# Altium PCB NBP3 Altera MAX7000 MAX3000 PLCC Rev1.00.PcbDoc (part 2 of 2)
Units mm, origin at the board's own origin, x right, y up, seen from the top; angles counter-clockwise.
Board outline 69 x 80.99 mm, 2 copper layers (Top Layer, Bottom Layer); 33 components, 75 nets, 412 pads, 171 vias.
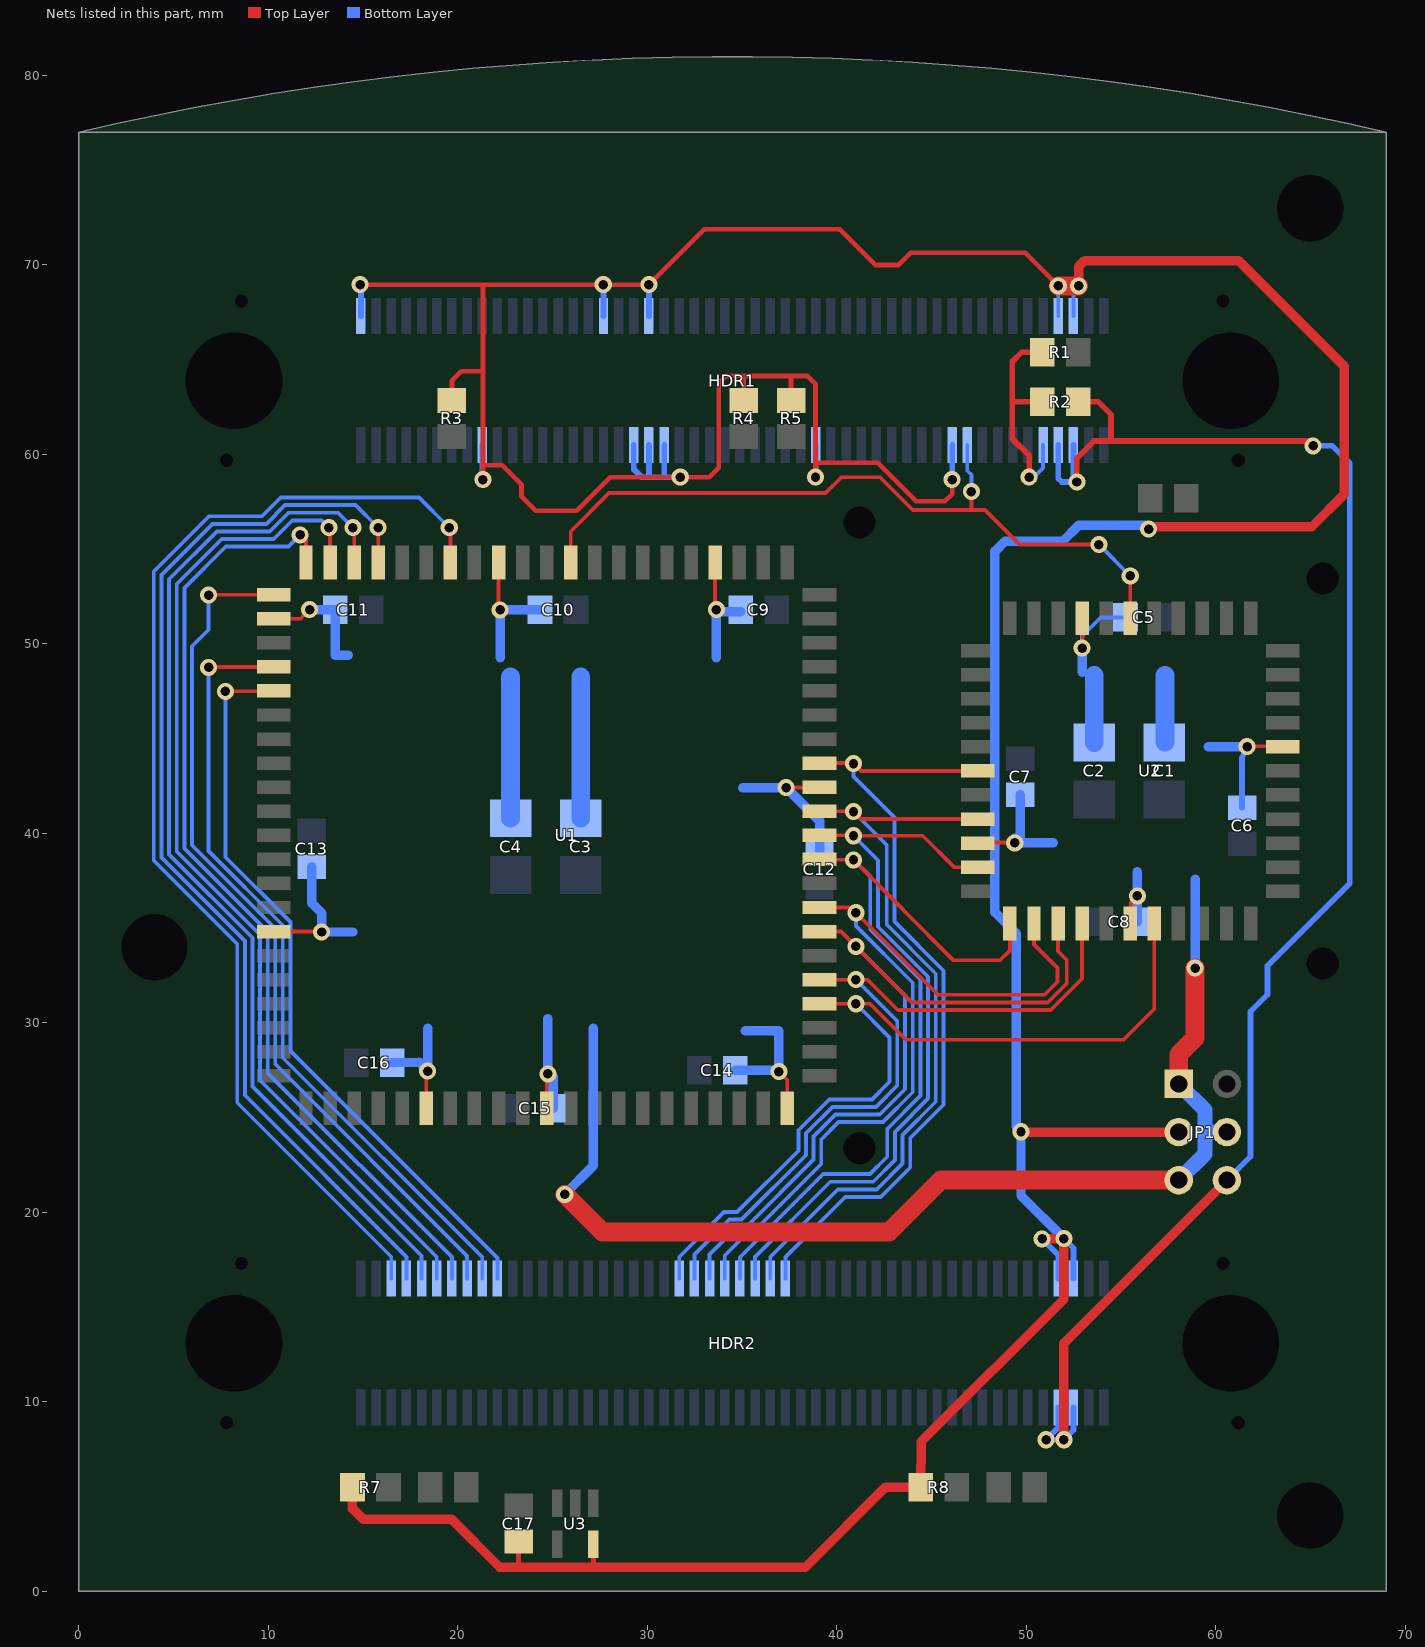
[diagram p2: the nets of this part, all layers, seen from the top]

## Via types
v1: diameter 0.9, hole 0.5, Top Layer to Bottom Layer, 165 vias
v2: diameter 1.27, hole 0.7, Top Layer to Bottom Layer, 6 vias

## Nets (pads, with @x,y where several pads share a name; then routed paths per layer and width w, separated by ;. In a path a pad name is that pad's centre, name@x,y a point inside that pad or via, vN(x,y) a via of type N, cw(c..) or ccw(c..) an arc to the next point about the centre after c; other vN are vias at no path point) (continued)
SW0: HDR2.44 U1.57 U2.24 | length 45.2
  Top Layer w0.2: U1.57@39.1,31.01 41.761,31.01 43.656,29.115 55.15,29.115 56.77,30.735 U2.24@56.77,35.25
  Bottom Layer w0.2: HDR2.44@31.7,16.5 31.7,17.653 34.064,20.017 34.749,20.017 37.986,23.254 37.986,24.338 39.613,25.965 41.865,25.965 42.799,26.899 42.799,29.232 v1(41.021,31.01)
SW1: HDR2.46 U1.58 U2.21 | length 41
  Top Layer w0.2: U1.58@39.1,32.28 41.634,32.28 43.231,30.683 51.308,30.683 52.96,32.335 U2.21@52.96,35.25
  Bottom Layer w0.2: HDR2.46@32.5,16.5 32.5,17.78 34.337,19.617 34.984,19.617 38.386,23.019 38.386,24.172 39.779,25.565 42.075,25.565 43.205,26.695 43.205,30.096 v1(41.021,32.28)
SW2: HDR2.48 U1.60 U2.20 | length 42.9
  Top Layer w0.2: U1.60@39.1,34.82 40.237,34.82 43.974,31.083 51.142,31.083 52.146,32.087 52.146,33.326 51.69,33.782 U2.20@51.69,35.25
  Bottom Layer w0.2: HDR2.48@33.3,16.5 33.3,17.78 34.737,19.217 35.219,19.217 38.786,22.784 38.786,24.007 39.944,25.165 42.278,25.165 43.612,26.499 43.612,31.445 v1(41.021,34.036)
SW3: HDR2.50 U1.61 U2.19 | length 44.5
  Top Layer w0.2: U1.61@39.1,36.09 40.745,36.09 45.352,31.483 50.977,31.483 51.664,32.17 51.664,32.893 50.42,34.137 U2.19@50.42,35.25
  Bottom Layer w0.2: HDR2.50@34.1,16.5 34.1,17.717 35.2,18.817 35.454,18.817 39.192,22.555 39.192,23.847 40.11,24.765 42.443,24.765 44.018,26.34 44.018,32.119 41.021,35.117 v1(41.021,35.814)
SW4: HDR2.52 U1.63 U2.18 | length 42.9
  Top Layer w0.2: U1.63@39.1,38.63 v1(40.894,38.608) 46.139,33.312 48.641,33.312 49.15,33.821 U2.18@49.15,35.25
  Bottom Layer w0.2: HDR2.52@34.9,16.5 34.9,17.628 39.294,22.022 41.758,22.022 42.672,22.936 42.672,24.409 44.425,26.162 44.425,32.279 41.783,34.92 41.783,37.719 v1(40.894,38.608)
SW5: HDR2.54 U1.64 U2.16 | length 39.2
  Top Layer w0.2: U1.64@39.1,39.9 40.872,39.9 v1(40.894,39.878) 44.545,39.878 46.203,38.22 U2.16@47.45,38.22
  Bottom Layer w0.2: HDR2.54@35.7,16.5 35.7,17.653 39.662,21.615 41.935,21.615 43.078,22.758 43.078,24.25 44.831,26.003 44.831,32.438 42.189,35.08 42.189,38.583 v1(40.894,39.878)
SW6: HDR2.56 U1.65 U2.14 | length 39.8
  Top Layer w0.2: U1.65@39.1,41.17 40.872,41.17 41.282,40.76 U2.14@47.45,40.76
  Bottom Layer w0.2: HDR2.56@36.5,16.5 36.5,17.653 40.062,21.215 42.12,21.215 43.485,22.581 43.485,24.091 45.237,25.843 45.237,32.597 42.647,35.188 42.647,39.395 v1(40.894,41.148)
SW7: HDR2.58 U1.67 U2.12 | length 42.2
  Top Layer w0.2: U1.67@39.1,43.71 40.872,43.71 41.282,43.3 U2.12@47.45,43.3
  Bottom Layer w0.2: HDR2.58@37.3,16.5 37.3,17.653 40.462,20.815 42.329,20.815 43.891,22.377 43.891,23.932 45.644,25.684 45.644,32.757 43.053,35.347 43.053,40.841 40.894,43 v1(40.894,43.688)
SWC0: HDR2.18 U1.15 | length 41.7
  Top Layer w0.2: v1(6.858,48.768) 6.88,48.79 U1.15@10.3,48.79
  Bottom Layer w0.2: v1(6.858,48.768) 6.858,39.069 10.775,35.153 10.775,28.163 21.3,17.638 HDR2.18@21.3,16.5
SWC1: HDR2.16 U1.12 | length 45.9
  Top Layer w0.2: v1(6.858,52.578) v1@6.88,52.578 ; v1@6.88,52.6 U1.12@10.3,52.6
  Bottom Layer w0.2: v1(6.858,52.578) 6.858,50.749 5.988,49.879 5.988,39.374 10.375,34.987 10.375,27.827 20.5,17.702 HDR2.16@20.5,16.5
SWC2: HDR2.14 U1.11 | length 51.3
  Top Layer w0.2: v1(11.684,55.753) 12,55.437 U1.11@12,54.3 ; U1.11@12.065,54.102 U1.11@12.065,54.3
  Bottom Layer w0.2: v1(11.684,55.753) 11.068,55.137 7.766,55.137 5.588,52.959 5.588,39.208 9.975,34.821 9.975,27.363 19.7,17.638 HDR2.14@19.7,16.5
SWC3: HDR2.6 U1.5 | length 62.3
  Top Layer w0.2: v1(19.558,56.134) 19.62,56.072 U1.5@19.62,54.3
  Bottom Layer w0.2: HDR2.6@16.5,16.5 16.5,17.663 8.375,25.788 8.375,34.159 3.962,38.571 3.962,53.823 6.877,56.737 9.671,56.737 10.668,57.734 17.958,57.734 v1(19.558,56.134)
SWR0: HDR2.20 U1.16 | length 39.5
  Top Layer w0.2: v1@7.769,47.52 v1(7.747,47.498) U1.16@10.3,47.52
  Bottom Layer w0.2: v1(7.747,47.498) 7.747,38.746 11.175,35.318 11.175,28.525 22.1,17.6 HDR2.20@22.1,16.5
SWR1: HDR2.12 U1.10 | length 53.8
  Top Layer w0.2: v1(13.208,56.134) 13.27,56.072 U1.10@13.27,54.3
  Bottom Layer w0.2: v1(13.208,56.134) 12.827,56.515 11.278,56.515 10.3,55.537 7.556,55.537 5.182,53.162 5.182,39.049 9.575,34.656 9.575,26.978 18.9,17.653 HDR2.12@18.9,16.5
SWR2: HDR2.10 U1.9 | length 55.8
  Top Layer w0.2: U1.9@14.54,54.3 14.54,56.072 v1(14.478,56.134) v1@14.54,56.174
  Bottom Layer w0.2: v1(14.478,56.134) 13.691,56.921 11.074,56.921 10.09,55.937 7.296,55.937 4.775,53.416 4.775,38.89 9.175,34.49 9.175,26.639 18.1,17.714 HDR2.10@18.1,16.5
SWR3: HDR2.8 U1.8 | length 57.8
  Top Layer w0.2: U1.8@15.81,54.3 v1(15.81,56.134)
  Bottom Layer w0.2: v1(15.81,56.134) 14.616,57.328 10.897,57.328 9.906,56.337 7.061,56.337 4.369,53.645 4.369,38.73 8.775,34.324 8.775,26.178 17.3,17.653 HDR2.8@17.3,16.5
TEST: HDR1.81 U1.84 U2.1 | length 40.3
  Top Layer w0.2: U1.84@25.97,54.3 25.97,55.942 27.991,57.963 39.421,57.963 40.259,58.801 42.291,58.801 44.018,57.074 47.828,57.074 49.657,55.245 v1(53.848,55.245) ; 47.117,57.074 v1(47.117,58.039) ; v1(55.499,53.594) v1(55.499,53.594) U2.1@55.5,51.35
  Bottom Layer w0.2: HDR1.81@46.9,60.5 46.9,59.145 47.117,58.928 v1(47.117,58.039) ; v1(53.848,55.245) v1(55.499,53.594)
VCC: C17.1 HDR1.2 HDR1.17 HDR1.34 HDR1.37 HDR1.39 HDR1.40 HDR1.41 HDR1.61 HDR1.79 HDR1.94 HDR1.96 HDR2.94 HDR2.96 JP1.3 R3.1 R4.1 R5.1 R7.1 R8.1 U3.5 | length 264.8
  Top Layer w0.25: v1(14.859,68.961) v1(30.099,68.961) 33.02,71.882 40.157,71.882 42.037,70.002 43.272,70.002 43.919,70.65 49.95,70.65 v1(51.7,68.9) ; R3.1@19.7,62.85 19.7,63.896 20.193,64.389 21.336,64.389 ; v1(21.336,58.674) 21.336,68.961 ; 21.336,59.436 22.352,59.436 23.368,58.42 23.368,57.785 24.13,57.023 26.289,57.023 28.067,58.801 33.274,58.801 33.782,59.309 33.782,63.754 34.163,64.135 38.481,64.135 38.887,63.729 v1(38.887,58.801) ; 23.217,1.27 C17.1@23.217,2.621 ; 27.167,1.27 U3.5@27.167,2.496 ; R4.1@35.1,62.85 35.1,64.135 ; R5.1@37.6,62.85 37.6,64.135 ; 38.887,59.563 42.164,59.563 44.196,57.531 45.72,57.531 46.101,57.912 v1(46.101,58.674)
  Top Layer w0.5: R7.1@14.45,5.5 14.45,4.369 15.009,3.81 19.685,3.81 22.225,1.27 38.354,1.27 42.584,5.5 R8.1@44.45,5.5 44.463,7.892 51.994,15.418 v1(51.994,18.618) ; 50.207,24.24 JP1.3@58.06,24.24 ; v1(50.851,18.6) v1@51.975,18.6 ; v1(52.775,68.9) 52.775,69.92 53.086,70.231 61.214,70.231 66.802,64.643 66.802,57.912 65.075,56.185 56.871,56.185 v1(56.464,56.058)
  Top Layer w1: v1(51.7,68.9) v1(52.775,68.9)
  Bottom Layer w0.2: HDR1.94@51.7,67.3 v1(51.7,68.9) ; HDR1.96@52.5,67.3 52.5,68.625 v1(52.775,68.9)
  Bottom Layer w0.3: HDR1.2@14.9,67.3 v1@14.9,68.92 ; v1@21.3,58.71 HDR1.17@21.3,60.5 ; HDR1.34@27.7,67.3 v1@27.7,68.947 ; HDR1.37@29.3,60.5 29.3,59.219 29.718,58.801 v1(31.75,58.801) ; 30.1,58.801 HDR1.39@30.1,60.5 ; HDR1.40@30.1,67.3 v1(30.099,68.961) ; 30.9,58.801 HDR1.41@30.9,60.5 ; v1@38.9,58.814 HDR1.61@38.9,60.5 ; v1(46.101,58.674) HDR1.79@46.1,60.5 ; v1(50.851,18.6) 51.7,17.751 HDR2.94@51.7,16.5 ; v1(51.994,18.618) 52.5,18.112 HDR2.96@52.5,16.5
  Bottom Layer w0.5: v1(51.994,18.618) 49.733,20.879 v1(49.733,24.257) 49.479,24.511 49.479,34.722 48.359,35.842 48.359,54.887 48.891,55.419 51.939,55.419 52.79,56.27 56.252,56.27 v1@56.591,55.931
  other v1: 27.686,68.961
VCC_FPGA: C1.1 C2.1 C3.1 C4.1 C5.1 C6.1 C7.1 C8.1 C9.2 C10.2 C11.2 C12.1 C13.2 C14.1 C15.1 C16.1 JP1.1 JP1.4 JP1.5 U1.3 U1.13 U1.26 U1.38 U1.43 U1.53 U1.66 U1.78 U2.3 U2.15 U2.23 U2.35 | length 166.8
  Top Layer w0.2: U1.26@10.3,34.82 v1@12.805,34.82 ; U1.13@10.3,51.33 11.706,51.33 v1(12.192,51.816) ; U1.38@18.35,25.5 18.35,27.113 v1(18.415,27.457) ; U1.3@22.16,54.3 22.16,51.881 v1(22.241,51.8) ; 24.7,26.732 U1.43@24.7,25.5 24.7,27.24 v1(24.765,27.305) ; U1.78@33.59,54.3 33.59,51.881 v1(33.655,51.816) ; v1(36.957,27.432) 37.4,26.989 U1.53@37.4,25.5 ; v1(37.338,42.418) 39.078,42.418 U1.66@39.1,42.44 ; U2.15@47.478,39.524 v1@49.122,39.524 ; v1@52.988,49.813 U2.3@52.988,51.384 ; U2.23@55.528,35.284 55.528,36.351 v1(55.88,36.703) ; v1(61.671,44.577) 62.003,44.604 U2.35@63.578,44.604
  Top Layer w1: v1(25.654,20.955) 27.635,18.974 42.774,18.974 45.5,21.7 JP1.5@58.06,21.7 ; JP1.1@58.06,26.78 58.06,28.342 58.928,29.21 v1(58.928,32.893)
  Bottom Layer w0.2: v1(52.959,49.784) 52.959,50.419 53.94,51.4 C5.1@55.25,51.4
  Bottom Layer w0.3: C6.1@61.4,41.35 61.4,44.001 v1(61.671,44.577)
  Bottom Layer w0.5: v1@12.208,51.8 C11.2@13.55,51.8 13.55,49.403 14.224,49.403 ; C13.2@12.3,38.25 12.3,36.322 12.827,35.795 v1(12.827,34.798) 14.478,34.798 ; C16.1@16.55,27.9 17.983,27.915 v1@18.372,27.5 ; v1(18.415,27.457) 18.415,29.718 ; 22.241,49.276 v1(22.241,51.8) C10.2@24.35,51.8 ; v1(24.765,27.305) 24.765,30.226 ; C15.1@25.05,25.5 v1@25.05,27.15 ; v1(25.654,20.955) 27.153,22.454 27.153,29.718 ; 33.655,49.276 v1(33.655,51.816) 33.771,51.7 C9.2@34.95,51.7 ; C14.1@34.65,27.5 36.889,27.5 v1(36.957,27.432) 36.957,29.591 35.179,29.591 ; 35.052,42.418 v1(37.338,42.418) 39.1,40.656 C12.1@39.1,39.05 ; v1@49.4,39.748 v1(49.403,39.497) ; C7.1@49.7,42.05 49.7,39.794 v1(49.403,39.497) ; 51.435,39.497 v1(49.403,39.497) ; 52.959,48.514 v1(52.959,49.784) ; C8.1@55.878,35.334 v1@55.878,36.701 ; v1(55.88,36.703) 55.88,37.973 ; v1(58.928,32.893) 58.928,37.592 ; 59.614,44.577 v1(61.671,44.577)
  Bottom Layer w0.8: JP1.5@58.06,21.7 59.436,23.076 59.436,25.404 JP1.1@58.06,26.78 ; 59.453,24.24 JP1.4@60.6,24.24
  Bottom Layer w1: C4.1@22.8,40.8 22.8,48.26 ; C3.1@26.5,40.8 26.5,48.26 ; C2.1@53.6,44.8 53.6,48.325 ; C1.1@57.328,44.834 57.328,48.336
VCCINT: HDR1.93 HDR1.95 HDR2.93 HDR2.95 JP1.6 R2.1 | length 90.3
  Top Layer w0.3: v1(52.68,58.547) 52.68,59.792 53.594,60.706 64.897,60.706 v1(65.151,60.452) ; R2.1@52.75,62.787 53.799,62.787 54.483,62.103 54.483,60.706
  Top Layer w0.5: v1(51.994,8.001) 51.994,13.094 JP1.6@60.6,21.7
  Bottom Layer w0.3: HDR1.93@51.7,60.5 51.7,58.739 51.892,58.547 v1(52.68,58.547) 52.5,58.727 HDR1.95@52.5,60.5 ; HDR2.95@52.5,9.7 52.5,8.507 v1(51.994,8.001) ; JP1.6@60.6,21.7 61.849,22.949 61.849,30.607 62.738,31.496 62.738,33.02 67.081,37.363 67.081,59.538 66.167,60.452 v1(65.151,60.452) ; v1(51.054,8.001) 51.7,8.647 ; v1(51.054,8.001) v1(51.994,8.001) ; v1(51.054,8.001) 51.7,8.647 ; v1(51.054,8.001) v1(51.994,8.001) ; 51.7,8.647 HDR2.93@51.7,9.7 51.7,8.647
VREF: HDR1.91 R1.1 R2.2 | length 12
  Top Layer w0.3: 49.276,62.787 R2.2@50.85,62.787 ; v1(50.165,58.801) 50.165,59.944 49.276,60.833 49.276,64.897 49.779,65.4 R1.1@50.85,65.4
  Bottom Layer w0.2: v1(50.165,58.801) 50.419,58.801 50.9,59.282 HDR1.91@50.9,60.5
pads on no net: HDR1.3 HDR1.4 HDR1.5 HDR1.6 HDR1.8 HDR1.9 HDR1.10 HDR1.11 HDR1.12 HDR1.13 HDR1.14 HDR1.16 HDR1.18 HDR1.20 HDR1.22 HDR1.24 HDR1.26 HDR1.28 HDR1.30 HDR1.32 HDR1.43 HDR1.44 HDR1.45 HDR1.46 HDR1.47 HDR1.48 HDR1.49 HDR1.50 HDR1.51 HDR1.52 HDR1.53 HDR1.55 HDR1.56 HDR1.57 HDR1.58 HDR1.60 HDR1.62 HDR1.64 HDR1.66 HDR1.68 HDR1.76 HDR1.80 HDR1.82 HDR1.83 HDR1.84 HDR1.85 HDR1.86 HDR1.87 HDR1.88 HDR1.89 HDR1.90 HDR1.92 HDR1.MH1 HDR1.MH2 HDR1.MH3 HDR1.MH4 HDR1.MH5 HDR1.MH6 HDR2.3 HDR2.5 HDR2.43 HDR2.45 HDR2.47 HDR2.49 HDR2.51 HDR2.53 HDR2.55 HDR2.57 HDR2.59 HDR2.61 HDR2.63 HDR2.65 HDR2.67 HDR2.69 HDR2.71 HDR2.73 HDR2.75 HDR2.76 HDR2.77 HDR2.78 HDR2.79 HDR2.80 HDR2.81 HDR2.82 HDR2.83 HDR2.84 HDR2.85 HDR2.86 HDR2.87 HDR2.88 HDR2.89 HDR2.90 HDR2.91 HDR2.92 HDR2.MH1 HDR2.MH2 HDR2.MH3 HDR2.MH4 HDR2.MH5 HDR2.MH6 U1.6 U1.39 U1.46 U1.79 U1.M1 U1.M2 U2.M1 U2.M2 U3.1

## Polygon pours and split planes (outlines as drawn)
GND on Top Layer "Top Layer-GND" (solid, remove dead copper, pour order 1000): 0.127,80.518 68.834,80.645 68.834,0.127 0.127,0.127
GND on Bottom Layer "Bottom Layer-GND" (solid, remove dead copper, pour order 1001): 0.127,80.518 68.834,80.645 68.834,0.127 0.127,0.127

## Keep-outs
Keep-Out Layer:
  the board outline again, w0.8

## Other copper
Bottom Layer:
  rectangle net VCC_FPGA: 33.655,29.21 35.56,48.133
  rectangle net VCC_FPGA: 13.97,29.21 15.875,48.133
  rectangle net VCC_FPGA: 13.97,47.752 35.56,49.657
  rectangle net VCC_FPGA: 15.494,29.21 34.036,31.115
  region net VCC_FPGA: 51.816,48.133 50.673,48.133 50.673,38.608 51.816,38.608
  rectangle net VCC_FPGA: 59.182,38.608 60.325,48.133
  rectangle net VCC_FPGA: 50.673,37.465 60.325,38.735
  rectangle net VCC_FPGA: 50.673,47.752 60.325,49.022

## Silkscreen, mask and mechanical layers (free items; w line width, h text height)
Top Overlay:
  circle w0.127: c4,34 r2.5
  circle w0.127: c65,4 r2.5
  circle w0.127: c65,73 r2.5
  lines w0.127: 0,1.5 1.5,1.5 1.5,0 ; 0,22.3 1.5,22.3 1.5,23.4 0,23.4 ; 0.001,53.6 1.501,53.6 1.501,54.7 0.001,54.7 ; 0,75.5 1.5,75.5 1.5,77.3 ; 15.7,79.8 15.7,78.1 17,78.1 17,79.9 ; 49.7,80.2 49.7,78.7 51,78.7 51,80.1 ; 67.5,0 67.5,1.5 69,1.5 ; 67.5,77.3 67.5,75.5 69,75.5 ; 68.999,22.3 67.5,22.3 67.5,23.4 69,23.4 ; 69,53.6 67.501,53.6 67.501,54.7 69.001,54.7
  lines w0.2: 43.963,21.7 54.885,21.7 56.155,22.97 56.409,22.97 ; 43.963,26.78 54.885,26.78 56.155,25.51 56.409,25.51 ; 56.409,20.43 56.155,20.43 54.885,19.16 43.963,19.16 43.963,29.32 54.885,29.32 56.155,28.05 56.409,28.05 ; 62.251,20.43 66.188,20.43 66.188,28.05 62.251,28.05 ; 62.251,22.97 66.188,22.97 ; 62.251,25.51 66.188,25.51
  text "MAX7000S" at 44.852,27.415 h1.2
  text "5V" at 63.14,26.145 h1.2
  text "MAX3000A" at 44.852,24.875 h1.2
  text "3V3" at 62.632,23.605 h1.2
  text "MAX7000AE" at 44.852,22.335 h1.2
  text "2V5" at 62.632,21.065 h1.2
  text "MAX7000B" at 44.852,19.795 h1.2
Bottom Overlay:
  drawing of 853 lines, arcs and shapes, not listed
  text "REV 1.00" at 47.6,76.5 h1.3
  text "NBP3" at 54.5,76.5 h1.3
  text "1" at 13.97,58.42 h1
  text "1" at 14.224,7.62 h1
PCB Boundary:
  the board outline again, w0.25
  text "PCB boundary coincides with centre-line of tracks and arc" at 0,-12 h0.75
Gerber ID:
  text ".Layer_Name" at 0,-6 h0.75
Printout ID:
  text ".Printout_Name" at 0,-10 h0.75
Design Information:
  drawing of 713 lines, arcs and shapes, not listed
  text "BOCD_1_00_Daughter_NBP3" at 317.627,202.041 h1.27
  text "DESIGN INFORMATION" at 261.62,201.914 h1.52
  text "BOARD NAME:" at 299.212,201.914 h1.52
  text "BOARD TECHNOLOGY" at 261.62,199.374 h1.52
  text "BOARD SIZE (REFER ALSO PROFILING INFORMATION)" at 309.88,199.374 h1.27
  text "69.00mm" at 312.6,197.1 h1.52
  text "19.685" at 277.419,197.012 h1.52
  text "81.00mm" at 335.6,197 h1.52
  text "7.874" at 291.389,196.885 h1.52
  text "7.874" at 264.446,196.834 h1.52
  text "X" at 328.549,196.326 h1.78
  text "(MIN. TRACK/   PADS  /   CLEARANCE     IN 0.001'')" at 260.096,194.294 h1.27
  text "MINIMUM ANNULAR RING 0.05MM (0.002'') EXTERNAL PER IPC-2221 CLASS 3 LEVEL C AND IS THE" at 261.62,191.754 h1.27
  text "MANUFACTURING REGISTRATION ALLOWANCE" at 261.62,189.468 h1.27
  text "LAND SIZE CALCULATION MINIMUM - NOMINAL HOLE SIZE + 0.508MM (0.020'')" at 261.62,186.674 h1.27
  text "AS INSTRUCTED" at 347.65,182.28 h1.52
  text "X" at 299.263,182.153 h1.52
  text "CIRCUIT TYPE:" at 261.62,182.102 h1.52
  text "SS" at 284.48,182.102 h1.27
  text "DS" at 302.26,182.102 h1.27
  text "X" at 316.865,182.102 h1.52
  text "PTH" at 320.04,182.102 h1.27
  text "ML" at 330.962,182.102 h1.27
  text "No. OFF" at 337.82,182.102 h1.27
  text "FINGER CONNECTOR DIM PER:" at 261.62,179.054 h1.52
  text "AS SHOWN" at 337.82,179.054 h1.27
  text "No. OFF TOTAL" at 278.384,176.26 h1.52
  text "ONE SIDE" at 320.04,176.26 h1.27
  text "BOTH SIDES" at 337.82,176.006 h1.27
  text "VIAS:" at 261.62,173.339 h1.52
  text "NONE" at 273.05,173.339 h1.14
  text "X" at 281.432,173.339 h1.52
  text "FEED THRU'" at 284.48,173.339 h1.14
  text "X" at 299.212,173.339 h1.52
  text "TENTED" at 302.26,173.339 h1.14
  text "UNIQUE DRILL" at 284.48,170.291 h1.14
  text "2 SIZE" at 302.26,170.291 h1.14
  text "BLIND LAYER SEQUENCE" at 320.04,170.291 h1.14
  text "Layer Stack Manager (Protel)" at 297.053,168.005 h1.27
  text "X" at 334.772,168.005 h1.52
  text "AS SHOWN" at 337.82,168.005 h1.27
  text "LAYER CONSTRUCTION PER:" at 261.62,167.878 h1.52
  text "Protel" at 342.646,165.338 h1.27
  text "(PFW)" at 352.933,165.211 h1.27
  text "ARTWORK:" at 261.62,165.084 h1.52
  text "MANUAL" at 284.48,165.084 h1.27
  text "DIGITISED" at 302.26,165.084 h1.27
  text "X" at 316.992,165.084 h1.52
  text "CAD" at 320.04,165.084 h1.27
  text "TYPE" at 330.962,165.084 h1.27
  text "ARTWORK/PATTERN MASTER LIST" at 261.62,160.385 h1.52
  text "DESCRIPTION" at 262.89,157.972 h1.27
  text "DRAWING No./CAD FILE REF." at 281.559,157.972 h1.27
  text "LAYER NAME" at 322.834,157.972 h1.27
  text "GERBER FILE REF" at 343.586,157.896 h1.27
  text "PCB FILE" at 261.366,155.432 h1.27
  text "BOCD_1_00_Daughter_NBP3" at 281.237,155.356 h1.27
  text "PcbDoc" at 312.979,155.356 h1.02
  text "Top Paste Mask" at 321.158,152.892 h1.02
  text "GTP" at 363.779,152.816 h1.27
  text "GERBER FILE" at 261.366,152.765 h1.27
  text "GTO" at 363.728,150.327 h1.27
  text "Top Overlay" at 321.158,150.301 h1.02
  text "GERBER FILE" at 261.366,150.225 h1.27
  text "Top Solder Mask" at 321.158,147.863 h1.02
  text "GTS" at 363.779,147.736 h1.27
  text "GERBER FILE" at 261.366,147.685 h1.27
  text "TOP LAYER" at 321.158,145.272 h1.02
  text "GTL" at 363.779,145.196 h1.27
  text "GERBER FILE" at 261.366,145.145 h1.27
  text "BOTTOMLAYER" at 321.158,142.732 h1.02
  text "GBL" at 363.779,142.656 h1.27
  text "GERBER FILE" at 261.366,142.605 h1.27
  text "Bottom Solder Mask" at 321.158,140.243 h1.02
  text "GBS" at 363.779,140.116 h1.27
  text "GERBER FILE" at 261.366,140.065 h1.27
  text "Bottom Overlay" at 321.158,137.652 h1.02
  text "GBO" at 363.779,137.576 h1.27
  text "GERBER FILE" at 261.366,137.525 h1.27
  text "Bottom Paste Mask" at 321.158,135.163 h1.02
  text "GBP" at 363.779,135.036 h1.27
  text "GERBER FILE" at 261.366,134.985 h1.27
  text "PCB Boundary" at 321.158,132.572 h1.02
  text "GM1" at 363.779,132.496 h1.27
  text "GERBER FILE" at 261.366,132.445 h1.27
  text "APERTURE LIST" at 261.366,130.032 h1.27
  text "APR" at 313.979,129.956 h1.27
  text "DRILL REPORT" at 261.366,127.492 h1.27
  text "DRR" at 313.979,127.416 h1.27
  text "EXCELLON DRILL" at 261.366,124.952 h1.27
  text "TXT" at 313.979,124.876 h1.27
  text "MATERIAL:" at 261.62,99.298 h1.52
  text "GLASS FIBRE EPOXY RESIN NEMA GRADE FR4 (MIL-S-13949H)" at 287.274,99.044 h1.27
  text "X" at 284.607,98.917 h1.52
  text "THICKNESS:" at 269.494,96.123 h1.27
  text "0.8mm" at 287.274,96.123 h1.27
  text "1.2mm" at 304.927,96.123 h1.27
  text "1.6mm" at 322.58,96.123 h1.27
  text "2.4mm" at 340.36,96.123 h1.27
  text "3.2mm" at 358.14,96.123 h1.27
  text "X" at 320.167,95.996 h1.52
  text "TOLERANCE:" at 269.367,93.075 h1.27
  text "IN A/W IPC-D-300G CLASS" at 287.02,93.075 h1.27
  text "3 LEVEL B" at 321.945,93.075 h1.27
  text "OTHER +/-" at 340.36,93.075 h1.27
  text "X" at 284.607,92.948 h1.52
  text "BOW & TWIST:" at 266.954,90.027 h1.27
  text "IN A/W IPC-D-300G CLASS" at 287.02,90.027 h1.27
  text "3 LEVEL B" at 321.945,90.027 h1.27
  text "AS SHOWN" at 340.487,89.9 h1.27
  text "X" at 284.607,89.773 h1.52
  text "COPPER THICKNESS (FINISHED)" at 269.367,86.725 h1.27
  text "OUTER:" at 274.193,84.439 h1.27
  text "18um" at 287.274,84.439 h1.27
  text "35um" at 314.325,84.439 h1.27
  text "70um" at 340.614,84.439 h1.27
  text "X" at 311.582,84.236 h1.52
  text "INNER SIGNAL:" at 265.811,81.391 h1.27
  text "18um" at 287.274,81.391 h1.27
  text "35um" at 314.325,81.391 h1.27
  text "70um" at 340.614,81.391 h1.27
  text "INNER PWR:" at 269.494,78.343 h1.27
  text "18um" at 287.274,78.343 h1.27
  text "35um" at 314.325,78.343 h1.27
  text "70um" at 340.614,78.343 h1.27
  text "STRUCTURE:" at 261.62,75.295 h1.52
  text "REFER" at 287.274,75.295 h1.27
  text "AS PER DRAWING No." at 287.147,72.12 h1.27
  text "AS SHOWN" at 340.487,72.12 h1.27
  text "X" at 337.947,71.993 h1.52
  text "DRILLING:" at 261.62,69.326 h1.52
  text "VIEWED FROM:" at 266.573,67.04 h1.27
  text "COMPONENT SIDE" at 287.274,67.04 h1.14
  text "SOLDER SIDE" at 314.071,67.04 h1.14
  text "X" at 284.607,66.786 h1.52
  text "REFERENCE:" at 268.859,63.992 h1.27
  text "AS SHOWN" at 287.147,63.865 h1.14
  text "PATTERN MASTER LIST" at 314.198,63.865 h1.14
  text "X" at 337.947,63.865 h1.52
  text "NC_DRILL FILES" at 340.487,63.865 h1.14
  text "X" at 284.607,63.738 h1.52
  text "PTH MINIMUM COPPER THICKNESS:" at 274.701,60.944 h1.27
  text "20um" at 314.325,60.944 h1.27
  text "X" at 311.658,60.817 h1.52
  text "OTHER" at 340.487,60.817 h1.27
  text "NPTH:" at 275.209,57.896 h1.27
  text "TENTED" at 287.147,57.769 h1.14
  text "X" at 311.658,57.769 h1.52
  text "PADS REMOVED" at 314.198,57.769 h1.14
  text "REMOVE PADS" at 340.487,57.769 h1.14
  text "X" at 284.607,57.642 h1.52
  text "2nd DRILL" at 287.147,54.721 h1.14
  text "BOTH" at 314.198,54.721 h1.14
  text "AS SHOWN" at 326.517,54.721 h1.14
  text "NONE" at 340.487,54.721 h1.14
  text "BOARD FINISH:" at 261.62,51.8 h1.52
  text "X" at 284.607,51.673 h1.52
  text "ETCHING" at 287.147,51.673 h1.14
  text "REFER PATTERN MASTER LIST" at 314.198,51.673 h1.14
  text "LEGEND / SCREEN PRINT:" at 281.94,48.752 h1.27
  text "NONE" at 314.198,48.625 h1.14
  text "COMPONENT" at 326.517,48.625 h1.14
  text "SOLDER" at 340.487,48.625 h1.14
  text "X" at 323.977,48.498 h1.52
  text "X" at 337.947,48.498 h1.52
  text "COLOUR:" at 272.161,45.704 h1.27
  text "WHITE" at 287.147,45.577 h1.14
  text "YELLOW" at 314.198,45.577 h1.14
  text "OTHER" at 340.487,45.577 h1.14
  text "X" at 284.607,45.45 h1.52
  text "X" at 284.607,42.529 h1.52
  text "LIQUID PHOTOIMAGEABLE" at 287.147,42.529 h1.14
  text "SCREEN PRINT" at 326.517,42.529 h1.14
  text "MATTE" at 287.147,39.481 h1.14
  text "GLOSS" at 299.847,39.481 h1.14
  text "GREEN" at 314.198,39.481 h1.14
  text "BLUE" at 326.517,39.481 h1.14
  text "G/Y" at 340.487,39.481 h1.14
  text "OTHER" at 351.917,39.481 h1.14
  text "X" at 297.18,39.354 h1.52
  text "SOLDER MASK COLOUR:" at 261.62,36.56 h1.14
  text "BLACK" at 287.147,36.433 h1.14
  text "GREEN" at 299.847,36.433 h1.14
  text "YELLOW" at 314.198,36.433 h1.14
  text "BLUE" at 326.517,36.433 h1.14
  text "OTHER" at 340.487,36.433 h1.14
  text "X" at 284.48,36.306 h1.52
  text "TRACK FINISH:" at 261.62,33.512 h1.52
  text "X" at 284.607,33.385 h1.52
  text "SELECTIVE SOLDER (HASL)" at 287.147,33.385 h1.14
  text "REFLOW SOLDER" at 326.517,33.385 h1.14
  text "SELECTIVE GOLD" at 287.147,30.337 h1.14
  text "um  (AREA" at 314.198,30.337 h1.14
  text "sq. mm)" at 342.011,30.337 h1.14
  text "REFER PATTERN MASTER LIST" at 287.147,27.289 h1.14
  text "OTHER" at 326.517,27.289 h1.14
  text "EDGE BOARD" at 261.62,24.368 h1.52
  text "1.3um HARD GOLD OVER 5um     NICKEL / TIN-NICKEL" at 287.147,24.241 h1.14
  text "CONTACTS:" at 261.62,22.209 h1.52
  text "HARD FINISH GOLDE PLATE" at 287.147,21.193 h1.14
  text "OTHER" at 326.517,21.193 h1.14
  text "AS SHOWN" at 287.147,18.145 h1.14
  text "REFER" at 326.517,18.145 h1.14
  text "PROFILING:" at 261.62,15.097 h1.52
  text "AS DIMENSIONED, MEASURED AND CUT FROM SPECIFIED DATUM." at 287.147,15.097 h1.14
  text "X" at 284.607,14.97 h1.52
  text "REFER PCB BLANK DWG No." at 287.274,12.176 h1.27
  text "USE PROFILE / ROUTE TAPE SUPPLIED (REFER PATTERN MASTER LIST)" at 287.274,9.128 h1.27
  text "SQUARE CUT" at 287.274,6.08 h1.27
  text "N.C. ROUTE" at 305.054,6.08 h1.27
  text "V. SCORE" at 322.834,6.08 h1.27
  text "BLANK" at 340.614,6.08 h1.27
  text "ACCEPTABILITY:" at 261.62,3.413 h1.52
  text "MATERIALS AND WORKMANSHIP FOR ALL PRINTED WIRING BOARDS TO MEET" at 283.845,3.286 h1.27
  text "OR EXCEED THE REQUIREMENTS OF:" at 283.845,0.492 h1.27
  text "IPC-6011/12 AND IPC-A-600E" at 287.401,-2.175 h1.27
  text "1" at 322.961,-2.175 h1.27
  text "2" at 331.851,-2.175 h1.27
  text "X" at 329.184,-2.302 h1.52
  text "X" at 284.734,-2.429 h1.52
  text "3" at 340.741,-4.334 h1.27
  text "UL CERTIFICATION" at 287.401,-5.223 h1.27
  text "AUSTEL" at 322.961,-5.223 h1.27
  text "X" at 284.734,-5.35 h1.52
  text "ML-P-55110F GRP" at 286.893,-8.271 h1.02
  text "A" at 305.181,-8.271 h1.27
  text "B" at 314.071,-8.271 h1.27
  text "AS2546" at 322.961,-8.271 h1.27
  text "OTHER" at 340.741,-8.271 h1.27
  text "ADDITIONAL" at 261.62,-11.192 h1.52
  text "NONE" at 287.401,-11.446 h1.27
  text "SAMPLE PLAN" at 305.181,-11.446 h1.27
  text "MIL-P-55110E SERIAL Nos. PER ORDER" at 322.961,-11.446 h1.27
  text "REQUIREMENTS:" at 261.62,-13.605 h1.52
  text "NONE" at 287.401,-14.494 h1.27
  text "ML-P-55110F GRP" at 304.673,-14.494 h1.02
  text "A" at 322.961,-14.494 h1.27
  text "B" at 331.851,-14.494 h1.27
  text "IPC CLASS:" at 337.82,-14.494 h1.27
  text "1" at 353.314,-14.494 h1.27
  text "2" at 359.664,-14.494 h1.27
  text "3" at 366.014,-14.494 h1.27
  text "QUALITY RELEASE REPORT" at 305.181,-17.542 h1.27
  text "OTHER" at 345.694,-17.542 h1.27
  text "PER ORDER" at 354.203,-17.669 h1.27
  text "X" at 343.027,-17.796 h1.52
  text "NONE" at 305.181,-20.59 h1.27
  text "REQUIRED" at 322.961,-20.59 h1.27
  text "PER ORDER" at 345.821,-20.59 h1.27
  text "ELECTRICAL TEST:" at 261.62,-20.717 h1.52
  text "X" at 320.294,-20.717 h1.52
  text "NONE" at 305.181,-23.638 h1.27
  text "1 SIDE" at 322.834,-23.638 h1.14
  text "2 SIDES" at 334.01,-23.638 h1.14
  text "MIN. PITCH" at 345.694,-23.638 h1.27
  text "0.80mm" at 359.283,-23.638 h1.27
  text "SURFACE MOUNT:" at 261.62,-23.765 h1.52
  text "X" at 331.775,-23.841 h1.52
  text "NONE" at 305.181,-26.686 h1.27
  text "FOIL" at 322.961,-26.686 h1.27
  text "LEGEND" at 334.391,-26.686 h1.27
  text "REFER" at 345.694,-26.686 h1.27
  text "MANUFACTURER'S ID/LOGO:" at 261.62,-26.813 h1.52
  text "ISO9001/AS3901" at 308.991,-29.734 h1.27
  text "NONE" at 345.694,-29.734 h1.27
  text "MANUFACTURER'S ACCREDITATION:" at 261.62,-29.861 h1.52
  text "X" at 306.324,-29.861 h1.52
  text "PER ORDER" at 305.181,-32.782 h1.27
  text "REFER" at 322.961,-32.782 h1.27
  text "PACKAGING AND HANDLING:" at 261.62,-32.909 h1.52
  text "X" at 302.514,-33.036 h1.52
Sheet:
  drawing of 1882 lines, arcs and shapes, not listed
  text "1" at 3.717,207.391 h1.78
  text "2" at 52.756,207.391 h1.78
  text "3" at 102.015,207.391 h1.78
  text "4" at 151.308,207.391 h1.78
  text "5" at 200.584,207.391 h1.78
  text "6" at 249.606,207.391 h1.78
  text "7" at 299.136,207.391 h1.78
  text "8" at 348.158,207.391 h1.78
  text "A" at -18.415,173.406 h1.78
  text "A" at 370.205,173.406 h1.78
  text "B" at -18.415,102.794 h1.78
  text "B" at 370.205,102.794 h1.78
  text "C" at -18.415,32.182 h1.78
  text "C" at 370.205,32.182 h1.78
  text "D" at -18.415,-37.922 h1.78
  text "D" at 370.205,-37.922 h1.78
  text "ENGINEER:" at 255.27,-38.1 h1.14
  text "TITLE:" at 293.37,-38.1 h1.14
  text "PCB DESIGNER:" at 255.27,-45.593 h1.14
  text "DATE:" at 255.27,-53.34 h1.14
  text "PART NO.:" at 293.37,-53.34 h1.14
  text "REV:" at 346.71,-53.34 h1.14
  text "Altium Limited" at 222.25,-55.88 h1.78
  text ".PRINT_DATE" at 256.54,-56.388 h1.78
  text "12a Rodborough Rd" at 222.25,-58.42 h1.78
  text "Frenchs Forest" at 222.25,-60.96 h1.78
  text "FILE NAME:" at 255.27,-60.96 h1.14
  text "DWG NO:" at 293.37,-60.96 h1.14
  text "SCALE:" at 346.71,-60.96 h1.14
  text "NSW 2086" at 222.25,-63.5 h1.78
  text ".PCB_FILE_NAME_NO_PATH" at 256.54,-64.008 h1.78
  text "1" at 3.717,-69.469 h1.78
  text "2" at 52.756,-69.469 h1.78
  text "3" at 102.015,-69.469 h1.78
  text "4" at 151.308,-69.469 h1.78
  text "5" at 200.584,-69.469 h1.78
  text "6" at 249.606,-69.469 h1.78
  text "7" at 299.136,-69.469 h1.78
  text "8" at 348.158,-69.469 h1.78
Drill Drawing:
  text ".Legend" at 0,-8 h0.75

## Dimensions
34.5,-69.801 to 34.5,84 on Dimensions
0,0 to 0.001,77 on Dimensions
0,0 to 69,0 on Dimensions

## Text inside footprints (layer, text, board x,y; h text height)
JP1: Top Overlay "1" at 58.568,28.558 h1 r90; Top Overlay "2" at 61.108,28.558 h1 r90; Top Overlay "5" at 58.568,19.287 h1 r90; Top Overlay "6" at 61.108,19.287 h1 r90